# Altium PCB PCBPadometer.PcbDoc
Units mm, origin at the board's own origin, x right, y up, seen from the top; angles counter-clockwise.
Board outline 47.04 x 33.14 mm, 2 copper layers (Top Layer, Bottom Layer); 12 components, 18 nets, 75 pads, 0 vias.
Unrouted connection lines stored in the file: 34.
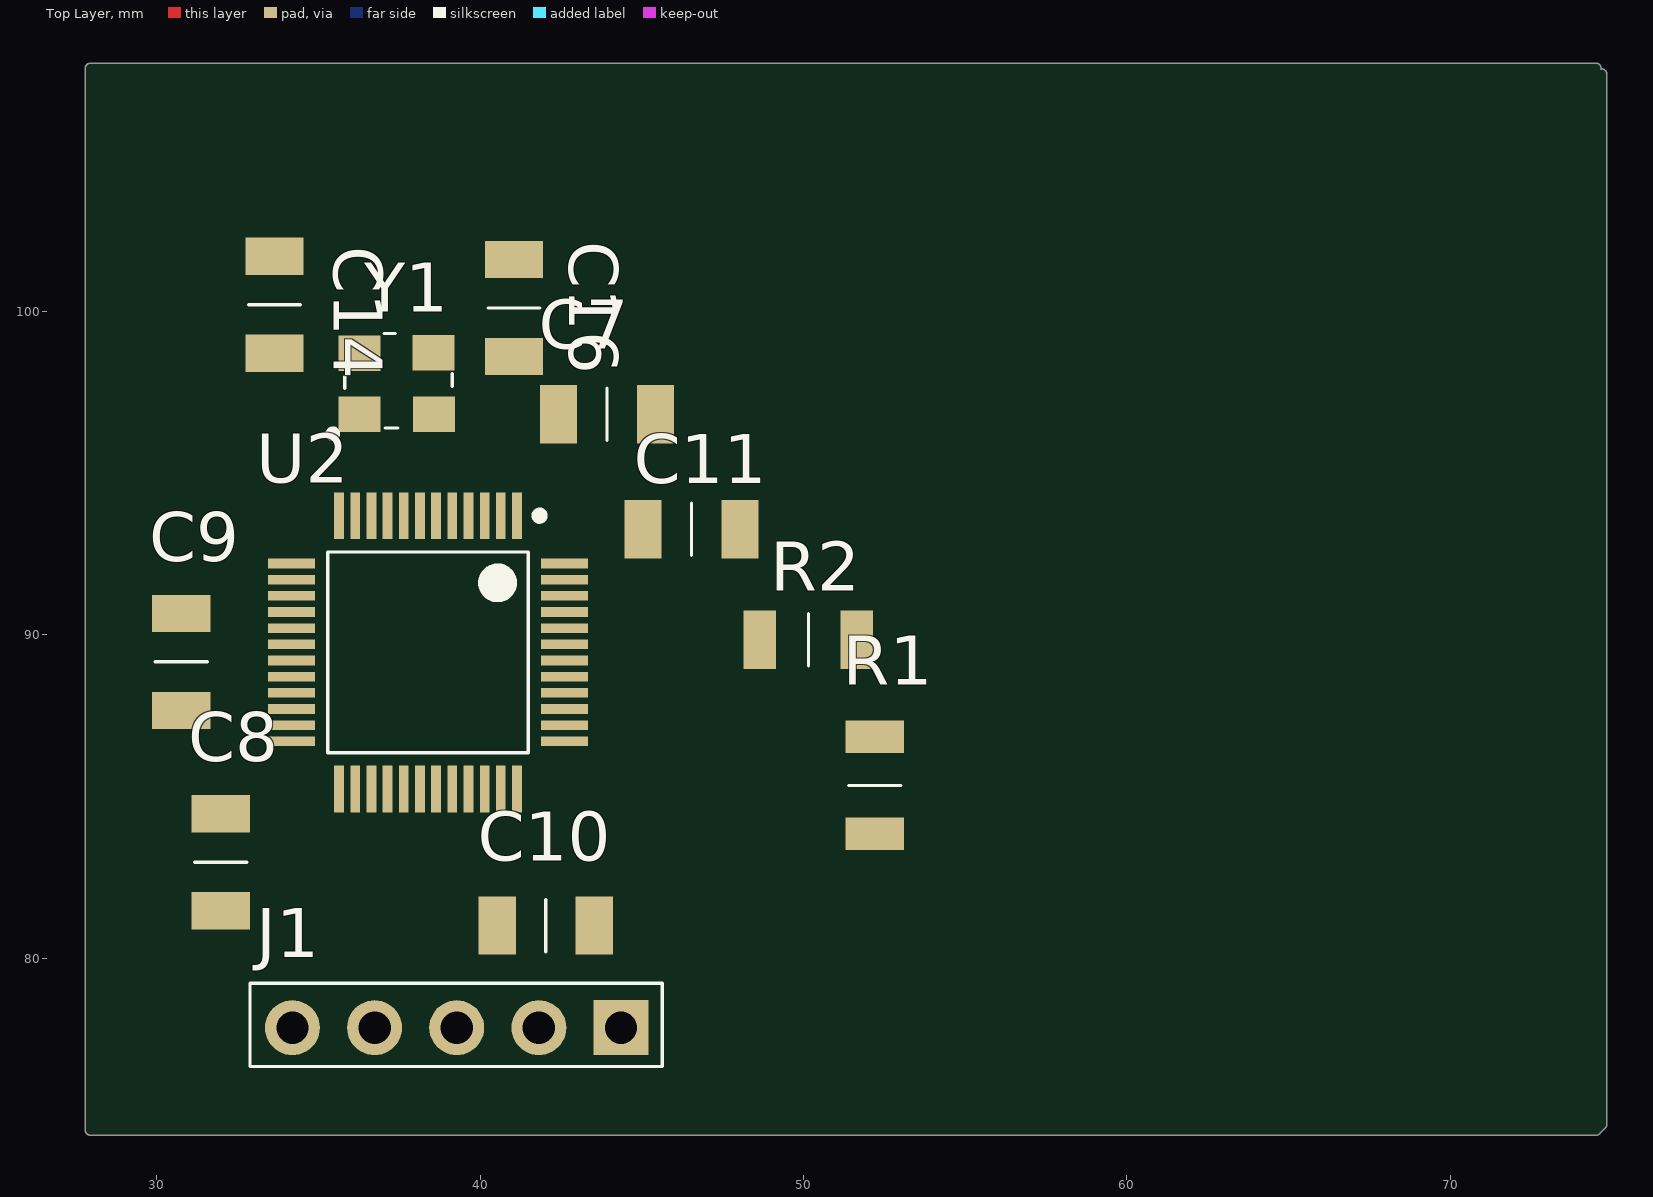
[diagram p0: Top Layer view]
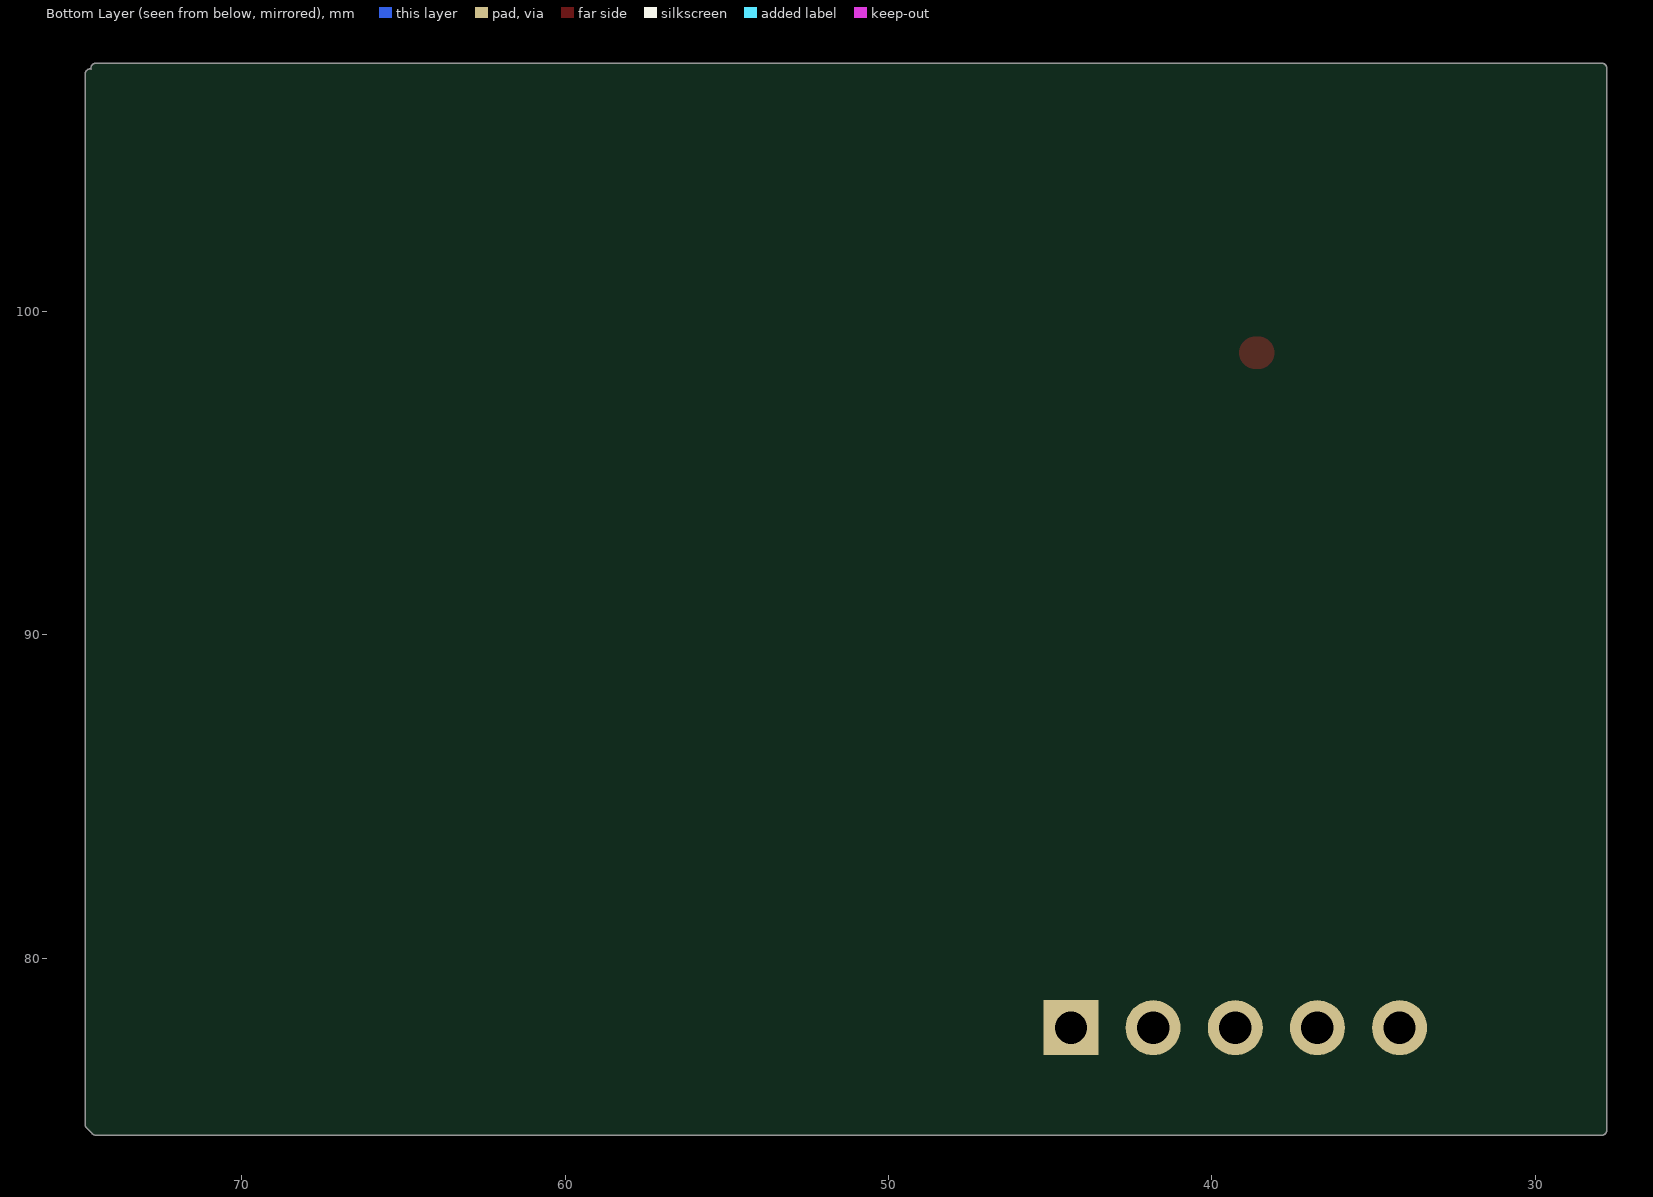
[diagram p1: Bottom Layer view, seen from below]

## Layer stack, top to bottom
Top Solder: solder mask 0.0102, Solder Resist, Dk 3.5
Top Layer: signal copper 0.0356
Dielectric 1: dielectric 0.32, FR-4, Dk 4.8
Bottom Layer: signal copper 0.0356
Bottom Solder: solder mask 0.0102, Solder Resist, Dk 3.5

## Board outline
27.945,74.527 cw(c27.945,74.678) 27.795,74.678 27.795,107.517 cw(c27.945,107.517) 27.945,107.667 74.509,107.667 cw(c74.509,107.517) 74.659,107.517 cw(c74.509,107.517) 74.656,107.489 cw(c74.684,107.341) 74.835,107.341 74.835,74.853 cw(c74.684,74.853) 74.79,74.747 74.791,74.747 74.615,74.571 74.615,74.572 cw(c74.509,74.678) 74.509,74.527

## Design rules (kind name [scope] priority, off if disabled: settings)
Clearance [All] p1: gap=0.254 ignorepadtopadclearanceinfootprint=FALSE except(0.152: Arc-Arc Arc-Track Arc-SMDPad Arc-Poly Track-Track Track-SMDPad Track-THPad Track-Poly SMDPad-SMDPad SMDPad-THPad SMDPad-Poly THPad-Poly Via-Poly Fill-Poly Poly-Poly)
PolygonConnect [All] p1: connectstyle=Relief reliefconductorwidth=0.254 reliefentries=4 polygonreliefangle="90 Angle" airgapwidth=0.254
RoutingVias [All] p1: holewidth=0.711 width=1.27 viastyle="Through Hole" minholewidth=0.711 minwidth=1.27 maxholewidth=0.711 maxwidth=1.27
SolderMaskExpansion [All] p1: expansion=0.102 istentingtop=FALSE
Width [All] p1: maxlimit=1 minlimit=0.254 preferedwidth=0.3 minimp=50.000000 maximp=50.000000 favimp=50.000000
30 further rules are at their usual default settings.

## Components (designator, comment, footprint, x,y, rotation, side; value= is the part's Value field where it differs from the comment)
C7 "0.1 uF C1206" C1206 43.352,97.318 r0 top
C8 "0.1 uF C1206" C1206 31.481,82.39 r90 top
C9 "0.1 uF C1206" C1206 30.26,88.585 r90 top
C10 "0.1 uF C1206" C1206 42.608,80.506 r180 top
C11 "0.1 uF C1206" C1206 45.963,93.761 r0 top
C14 "16 pF" C1206 34.148,100.774 r270 top
C16 "16 pF" C1206 40.552,99.529 r90 top
J1 "Header 2.54 1x5" "Header 2.54 1x5" 44.36,77.849 r180 top
R1 "10K R1206" "R1206 Resıstor" 52.205,85.417 r270 top
R2 "10K R1206" "R1206 Resıstor" 50.077,89.847 r0 top
U2 "STM32F101_1" LQFP48-STM 38.392,89.453 r270 top
Y1 "8 MHz 12.5 pf Osc" "8 MHZ Osc." 37.261,97.301 r0 top

## Footprints (in the part's own frame and the unit in brackets; to place one, negate y for a bottom-side part, rotate by r counter-clockwise, add the part's x,y. Pads: shape width x height; smd on the part's side, far side on the other; paste and mask are expansions set on the pad)
"8 MHZ Osc." [mm]
  rect 1.3x1.1 smd mask+0.05: 1(-0.981,-0.49) 2(1.319,-0.49) 3(1.303,1.417) 4(-0.986,1.401)
  silkscreen extent -1.91,-1.19 1.88,2.01, body extent -1.38,-0.64 1.82,1.86, height 1.22
C1206 [mm]
  rect 1.15x1.8 smd mask+0.05: 1(-0.925,-0.5) 2(2.075,-0.5)
  silkscreen extent 0.58,-1.3 0.58,0.31, body extent -1.02,-1.3 2.18,0.3, height 1
"Header 2.54 1x5" [mm]
  rect 1.7x1.7 hole 1 mask+0.05: 1(0,0)
  round 1.7 hole 1 mask+0.05: 2(2.54,0) 3(5.08,0) 4(7.62,0) 5(10.16,0)
  silkscreen extent -1.28,-1.37 11.48,1.2, body extent -1.25,-1.3 11.45,1.2, height 9.1
LQFP48-STM [mm] "TSQFP, 48-Leads, Body 7,00x7,00mm, Pitch 0,50mm, IPC Medium Density"
  rect 1.45x0.3 smd mask+0.05: 1(-4.225,2.75) 2(-4.225,2.25) 3(-4.225,1.75) 4(-4.225,1.25) 5(-4.225,0.75) 6(-4.225,0.25) 7(-4.225,-0.25) 8(-4.225,-0.75) 9(-4.225,-1.25) 10(-4.225,-1.75) 11(-4.225,-2.25) 12(-4.225,-2.75) 25(4.225,-2.75) 26(4.225,-2.25) 27(4.225,-1.75) 28(4.225,-1.25) 29(4.225,-0.75) 30(4.225,-0.25) 31(4.225,0.25) 32(4.225,0.75) 33(4.225,1.25) 34(4.225,1.75) 35(4.225,2.25) 36(4.225,2.75)
  rect 0.3x1.45 smd mask+0.05: 13(-2.75,-4.225) 14(-2.25,-4.225) 15(-1.75,-4.225) 16(-1.25,-4.225) 17(-0.75,-4.225) 18(-0.25,-4.225) 19(0.25,-4.225) 20(0.75,-4.225) 21(1.25,-4.225) 22(1.75,-4.225) 23(2.25,-4.225) 24(2.75,-4.225) 37(2.75,4.225) 38(2.25,4.225) 39(1.75,4.225) 40(1.25,4.225) 41(0.75,4.225) 42(0.25,4.225) 43(-0.25,4.225) 44(-0.75,4.225) 45(-1.25,4.225) 46(-1.75,4.225) 47(-2.25,4.225) 48(-2.75,4.225)
  silkscreen extent -4.35,-3.1 3.1,3.58, body extent -4.5,-4.5 4.5,4.5, height 1.6
"R1206 Resıstor" [mm]
  rect 1x1.8 smd mask+0.05: 1(-1.425,0) 2(1.575,0)
  silkscreen extent 0.08,-0.8 0.08,0.81, body extent -1.52,-0.8 1.68,0.81, height 0.55

## Part data
U2: "STM32F101 48 PİNLİ MİKROİŞLEMCİ"

## Nets (pads, with @x,y where several pads share a name; then routed paths per layer and width w, separated by ;. In a path a pad name is that pad's centre, name@x,y a point inside that pad or via, vN(x,y) a via of type N, cw(c..) or ccw(c..) an arc to the next point about the centre after c; other vN are vias at no path point)
"3.3 V": C7.1 C8.1 C9.1 C10.1 C11.1 J1.1 R1.2 U2.1 U2.9 U2.24 U2.36 U2.48
GND: C7.2 C8.2 C9.2 C10.2 C11.2 C14.1 C16.1 J1.3 R1.1 R2.2 U2.8 U2.23 U2.35 U2.47 Y1.2 Y1.4
NetC14_2: C14.2 U2.6 Y1.1
NetC16_2: C16.2 U2.5 Y1.3 | length 0.1
  Top Layer w1: Y1.3 Y1.3@38.664,98.718
NetJ1_2: J1.2 U2.37
NetJ1_4: J1.4 U2.34
NetJ1_5: J1.5 U2.7
NetR2_1: R2.1 U2.44
NetU1_1: U2.25
NetU1_2: U2.42
NetU1_8: U2.27
NetU1_10: U2.39
NetU1_11: U2.40
NetU1_12: U2.41
NetU1_13: U2.38
NetU2_21: U2.21
NetU2_22: U2.22
NetU2_26: U2.26
pads on no net: U2.2 U2.3 U2.4 U2.10 U2.11 U2.12 U2.13 U2.14 U2.15 U2.16 U2.17 U2.18 U2.19 U2.20 U2.28 U2.29 U2.30 U2.31 U2.32 U2.33 U2.43 U2.45 U2.46